# Allegro board DSP.brd
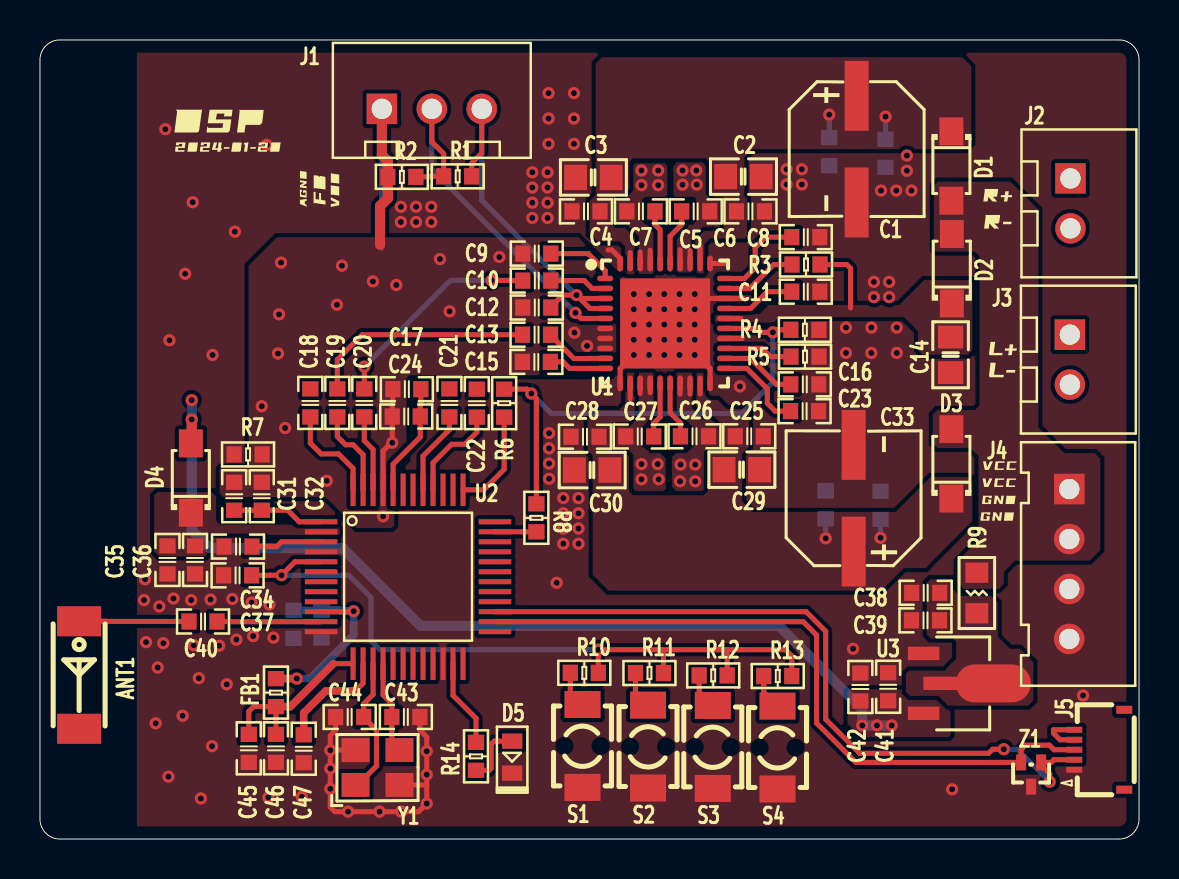
[diagram p0: board, top side]
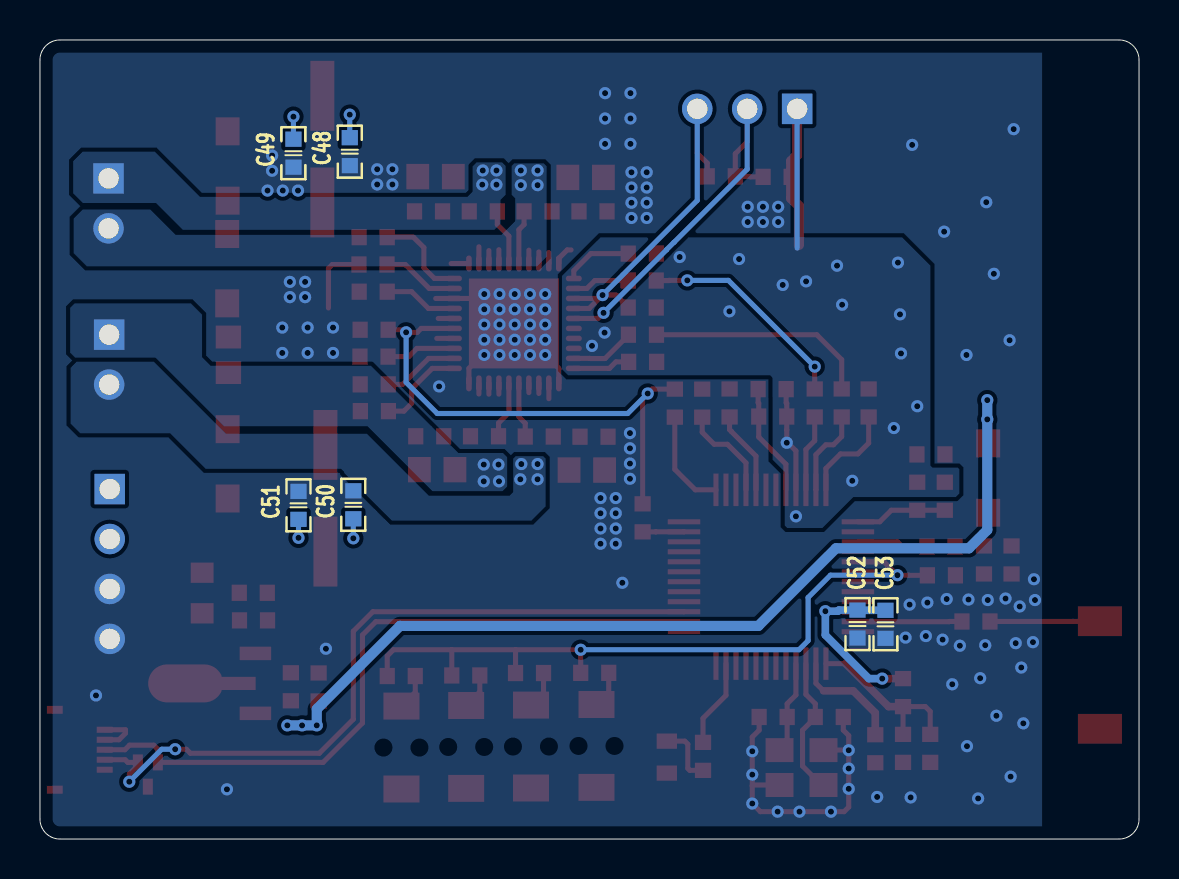
[diagram p1: board, bottom side, seen from below]

Outline 55 x 40 mm; copper layers: TOP, BOTTOM. Coordinates in mm from the lower left corner of the outline.
Outline path: 0,39 0,1 arc(0.29,0.29) 1,0 54,0 arc(54.71,0.29) 55,1 55,39 arc(54.71,39.71) 54,40 1,40 arc(0.29,39.71) 0,39

## Design rules (mm)
constraint set DEFAULT: min track width 0.203

## Placement (name value [footprint] x y rotation side)
ANT1  AN2051-245  [ANT-SMD-2X5_1]  1.96 8.21 270 top
C1  100uF  [CAP_SMD-6_3X7_7]  40.87 34.53 270 top
C2  10uF  [C0805]  35.2 33.16 180 top
C3  10uF  [C0805]  27.69 33.12 180 top
C4  1uF  [C0603]  27.32 31.42 180 top
C5  1uF  [C0603]  32.81 31.42 0 top
C6  1uF  [C0603]  35.55 31.42 0 top
C7  1uF  [C0603]  30.07 31.42 180 top
C8  1uF  [C0603]  38.32 30.13 180 top
C9  1uF  [C0603]  24.86 29.31 180 top
C10  1uF  [C0603]  24.86 27.96 180 top
C11  1uF  [C0603]  38.32 27.4 180 top
C12  1uF  [C0603]  24.86 26.61 180 top
C13  1uF  [C0603]  24.85 25.25 180 top
C14  10uF  [C0805]  45.57 24.24 90 top
C15  1uF  [C0603]  24.84 23.89 180 top
C16  220pF  [C0603]  38.27 22.76 180 top
C17  10uF  [C0603]  18.36 22.52 0 top
C18  10uF  [C0603]  13.53 21.83 270 top
C19  10uF  [C0603]  14.88 21.83 270 top
C20  0.1uF  [C0603]  16.23 21.83 270 top
C21  10uF  [C0603]  20.49 21.83 270 top
C22  10uF  [C0603]  21.86 21.82 270 top
C23  1uF  [C0603]  38.26 21.42 180 top
C24  0.1uF  [C0603]  18.33 21.15 0 top
C25  1uF  [C0603]  35.49 20.16 0 top
C26  1uF  [C0603]  32.75 20.16 0 top
C27  1uF  [C0603]  30.01 20.15 180 top
C28  1uF  [C0603]  27.27 20.14 180 top
C29  10uF  [C0805]  35.12 18.49 180 top
C30  10uF  [C0805]  27.63 18.47 180 top
C31  10uF  [C0603]  9.72 17.16 270 top
C32  0.1uF  [C0603]  11.1 17.16 270 top
C33  100uF  [CAP_SMD-6_3X7_7]  40.72 17.06 90 top
C34  1uF  [C0603]  9.91 14.64 0 top
C35  10uF  [C0603]  6.38 13.97 90 top
C36  0.1uF  [C0603]  7.76 13.97 90 top
C37  0.1uF  [C0603]  9.89 13.2 180 top
C38  0.1uF  [C0603]  44.32 12.33 180 top
C39  10uF  [C0603]  44.31 10.95 180 top
C40  10pF  [C0603]  8.16 10.89 0 top
C41  10uF  [C0603]  42.44 7.62 90 top
C42  0.1uF  [C0603]  41.05 7.61 90 top
C43  12pF(NC)  [C0603]  18.31 6.11 0 top
C44  12pF(NC)  [C0603]  15.5 6.11 180 top
C45  0.1uF  [C0603]  10.45 4.54 270 top
C46  10uF  [C0603]  11.81 4.54 270 top
C47  0.1uF  [C0603]  13.2 4.52 270 top
C48  10uF  [C0603]  39.5 34.41 90 bottom
C49  0.1uF  [C0603]  42.32 34.33 90 bottom
C50  0.1uF  [C0603]  39.32 16.73 90 bottom
C51  10uF  [C0603]  42.06 16.7 90 bottom
C52  0.1uF  [C0603]  14.09 10.76 270 bottom
C53  10uF  [C0603]  12.69 10.75 270 bottom
D1  DSK34  [SOD-123FL]  45.61 33.69 270 top
D2  DSK34  [SOD-123FL]  45.63 28.55 90 top
D3  DSK34  [SOD-123FL]  45.61 18.78 90 top
D4  DSK34  [SOD-123FL]  7.55 18.07 90 top
D5  Green  [LED0603]  23.63 4.1 270 top
FB1  600R  [R0603]  11.81 7.33 270 top
J1  XH2.54 3P  [XH_254-3P]  19.61 36.55 0 top
J2  XH2.54 2P  [XH_254-2P]  51.57 31.82 270 top
J3  XH2.54 2P  [XH_254-2P]  51.54 24 270 top
J4  XH2.54 4P  [XH_254-4P]  51.51 13.77 270 top
J5  FPC_5P  [FPC_05-5P]  53.01 4.47 90 top
NOREF  -  []  2 0 90 top
NOREF#2  -  []  9.42 34.65 0 top
NOREF#3  -  []  9.13 35.96 0 top
NOREF#4  -  []  57.9 36.71 0 top
NOREF#5  -  []  17.74 41.77 0 top
NOREF#6  -  []  58.48 10.39 0 top
NOREF#7  -  []  57.19 26.7 0 top
NOREF#8  -  []  14.81 42.05 0 top
NOREF#9  -  []  56.91 15.53 0 top
NOREF#10  -  []  56.83 17.56 0 top
NOREF#11  -  []  58.17 40.04 0 top
NOREF#12  -  []  57.17 24.13 0 top
NOREF#13  -  []  20.57 42.09 0 top
NOREF#14  -  []  0 43 0 top
NOREF#15  -  []  57.09 13.35 0 top
R1  1K  [R0603]  20.9 33.17 0 top
R2  1K  [R0603]  18.11 33.15 0 top
R3  10K  [R0603]  38.33 28.76 0 top
R4  1K  [R0603]  38.28 25.49 0 top
R5  120K  [R0603]  38.28 24.15 0 top
R6  10K  [R0603]  23.23 21.82 270 top
R7  0R  [R0603]  10.41 19.25 180 top
R8  2.2k(NC)  [R0603]  24.84 16.08 270 top
R9  5R  [R0805]  46.88 12.32 270 top
R10  39K  [R0603]  27.24 8.32 0 top
R11  2.2K  [R0603]  30.5 8.31 0 top
R12  18K  [R0603]  33.69 8.19 0 top
R13  8.2K  [R0603]  36.92 8.16 0 top
R14  1K  [R0603]  21.82 4.14 90 top
S1  MODE  [KEY_SMD]  27.15 4.66 90 top
S2  P/P  [KEY_SMD]  30.43 4.63 90 top
S3  NEXT/VOL+  [KEY_SMD]  33.67 4.61 90 top
S4  PREV/VOL-  [KEY_SMD]  36.91 4.58 90 top
U1  PAM8610TR  [WQFN40-EP-6X6]  31.28 25.81 270 top
U2  BP1048B1  [LQFP_48]  18.42 13.13 0 top
U3  HT7550S  [SOT-89-3]  45.57 7.79 180 top
Y1  24Mhz  [CRYSTAL_SMD3225-4P]  16.89 3.58 0 top
Z1  RCLAMP0502B  [SOT-523]  49.6 3.23 90 top

## Library data of the parts
ANT1 = ANT
C1 C33 = CE
C2-C32 C34-C53 = C
D1-D4 = DIODE SCHOTTKY
D5 = LED
FB1 = FB
J1 = CON_3
J2 J3 = CON_2
J4 = CON_4
J5 = CON_7
R1-R14 = R
S1-S4 = KEY_D_OPEN
U1 = PAM8610TR
U2 = BP1048B2
U3 = HT7550
Y1 = CRYSTAL_F_0
Z1 = TVS_Dual

## Footprints (pads in the part's own frame, mm; a bottom-side part is the same pattern mirrored in y, then rotated)
ANT-SMD-2X5_1
  rect 1.501x2.2 smd: 1(-2.69,0) 2(2.69,0)
C0603
  rect 0.762x0.813 smd: 1(-0.701,0) 2(0.701,0)
C0805
  rect 1.143x1.27 smd: 1(-0.889,0) 2(0.889,0)
CAP_SMD-6_3X7_7
  rect 3.5x1.199 smd: 1(-2.669,0) 2(2.669,0)
CRYSTAL_SMD3225-4P
  rect 1.399x1.199 smd: 1(-1.1,-0.874) 2(1.1,-0.874) 3(1.1,0.874) 4(-1.1,0.874)
FPC_05-5P
  rect 0.3x0.8 smd: 1(-1,1.25) 2(-0.5,1.25) 3(0,1.25) 4(0.5,1.25) 5(1,1.25)
  rect 0.4x0.8 smd: 6(2,-1.25) 7(-2,-1.25)
KEY_SMD
  rect 1.351x1.801 smd: 1(-2.075,0) 2(2.075,0)
LED0603
  rect 0.762x1.016 smd: 1(-0.8,0) 2(0.8,0)
LQFP_48
  rect 1.626x0.254 smd: 1(-4.351,2.751) 2(-4.351,2.25) 3(-4.351,1.75) 4(-4.351,1.25) 5(-4.351,0.749) 6(-4.351,0.249) 7(-4.351,-0.249) 8(-4.351,-0.749) 9(-4.351,-1.25) 10(-4.351,-1.75) 11(-4.351,-2.25) 12(-4.351,-2.751) 25(4.351,-2.751) 26(4.351,-2.25) 27(4.351,-1.75) 28(4.351,-1.25) 29(4.351,-0.749) 30(4.351,-0.249) 31(4.351,0.249) 32(4.351,0.749) 33(4.351,1.25) 34(4.351,1.75) 35(4.351,2.25) 36(4.351,2.751)
  rect 0.254x1.626 smd: 13(-2.751,-4.351) 14(-2.25,-4.351) 15(-1.75,-4.351) 16(-1.25,-4.351) 17(-0.749,-4.351) 18(-0.249,-4.351) 19(0.249,-4.351) 20(0.749,-4.351) 21(1.25,-4.351) 22(1.75,-4.351) 23(2.25,-4.351) 24(2.751,-4.351) 37(2.751,4.351) 38(2.25,4.351) 39(1.75,4.351) 40(1.25,4.351) 41(0.749,4.351) 42(0.249,4.351) 43(-0.249,4.351) 44(-0.749,4.351) 45(-1.25,4.351) 46(-1.75,4.351) 47(-2.25,4.351) 48(-2.751,4.351)
R0603
  rect 0.762x0.813 smd: 1(-0.701,0) 2(0.701,0)
R0805
  rect 1.016x1.143 smd: 1(-1.016,0) 2(1.016,0)
SOD-123FL
  rect 1.399x1.199 smd: 1(1.735,0) 2(-1.735,0)
SOT-89-3
  rect 1.575x0.673 smd: 1(1.356,-1.501) 3(1.356,1.499)
  custom 5.375x1.9 smd: 2(-1.321,0)
SOT-523
  rect 0.8x0.5 smd: 1(0.607,-0.5) 2(0.607,0.5) 3(-0.607,0)
WQFN40-EP-6X6
  oval 0.279x0.8 smd: 1(-2.25,-3) 2(-1.75,-3) 3(-1.25,-3) 4(-0.75,-3) 5(-0.25,-3) 6(0.25,-3) 7(0.75,-3) 8(1.25,-3) 9(1.75,-3) 10(2.25,-3) 21(2.25,3) 22(1.75,3) 23(1.25,3) 24(0.75,3) 25(0.25,3) 26(-0.25,3) 27(-0.75,3) 28(-1.25,3) 29(-1.75,3) 30(-2.25,3)
  oval 0.8x0.279 smd: 11(3,-2.25) 12(3,-1.75) 13(3,-1.25) 14(3,-0.75) 15(3,-0.25) 16(3,0.25) 17(3,0.75) 18(3,1.25) 19(3,1.75) 20(3,2.25) 31(-3,2.25) 32(-3,1.75) 33(-3,1.25) 34(-3,0.75) 35(-3,0.25) 36(-3,-0.25) 37(-3,-0.75) 38(-3,-1.25) 39(-3,-1.75) 40(-3,-2.25)
  rect 4.501x4.501 smd: 41(0,0)
XH_254-2P
  rect 1.524x1.524 hole 1.016: 1(-1.25,0)
  round 1.524 hole 1.016: 2(1.25,0)
XH_254-3P
  rect 1.524x1.524 hole 1.016: 1(-2.499,0)
  round 1.524 hole 1.016: 2(0,0) 3(2.499,0)
XH_254-4P
  rect 1.524x1.524 hole 1.016: 1(-3.75,0)
  round 1.524 hole 1.016: 2(-1.25,0) 3(1.25,0) 4(3.75,0)

## Nets
5V: C41.1 C42.1 D4.1 U3.3(VOUT)
AGND: C9.2 C12.2 C15.2 C17.1 C24.1 C31.1 C32.1 J1.1 R2.1 R7.1 U1.6 U1.7 U1.8 U2.45
GND: C1.2 C2.1 C3.2 C4.2 C6.2 C8.1 C11.1 C14.1 C16.1 C23.1 C25.2 C28.2 C29.1 C30.2 C33.2 C34.1 C35.1 C36.1 C37.2 C38.2 C39.2 C41.2 C42.2 C43.2 C44.2 C45.2 C46.2 C47.2 C48.1 C49.1 C50.2 C51.2 C52.2 C53.2 D5.2(CATHODE) J4.3 J4.4 J5.1 R4.2 R5.2 R7.2 S1.1 S2.1 S3.1 S4.1 U1.11 U1.20 U1.24 U1.28 U1.31 U1.40 U1.41 U2.4 U2.12 U2.22 U3.1 Y1.2 Y1.4 Z1.3
PVCCL: C25.1 C28.1 C29.2 C30.1 C33.1 C50.1 C51.1 D3.2 U1.12 U1.19
PVCCR: C1.1 C2.2 C3.1 C4.1 C6.1 C48.2 C49.2 D1.2 U1.32 U1.39
VBUS: J5.4 J5.5
VCC: D1.1 D2.1 D3.1 J4.1 J4.2 R9.1
VDD33: C52.1 C53.1 FB1.1 U2.10
AUX_L: C21.1
AUX_R: C22.1
BT_RF: C40.2 U2.11
DAC_L: C13.2 C19.1
DAC_R: C10.2 C20.1
DAC_X: C18.1
KEY: C37.1 R10.2 R11.2 R12.2 R13.2 U2.5
LOUT+: C26.2 J3.1 U1.17 U1.18
LOUT-: C27.2 J3.2 U1.13 U1.14
MUTE: R4.1 R6.1 R8.1 U1.25
POWER: C14.2 D2.2 R3.2 U1.26
ROUT+: C5.2 J2.1 U1.33 U1.34
ROUT-: C7.2 J2.2 U1.37 U1.38
USB_D+: J5.2 U2.27 Z1.1
USB_D-: J5.3 U2.26 Z1.2
N770386: R11.1 S2.2
N770424: R13.1 S4.2
N770462: R12.1 S3.2
N770500: R10.1 S1.2
N773268: C9.1 U1.1
N774002: C10.1 U1.2
N774087: C12.1 J1.3 R1.2 U1.3 U1.4(VREF)
N775087: J1.2 R1.1 R2.2 U1.5
N778232: C15.1 U1.10
N778264: C13.1 U1.9
N780483: C7.1 U1.36
N780544: C5.1 U1.35
N782637: C27.1 U1.15
N782641: C26.1 U1.16
N787715: R3.1 U1.29
N789518: C8.2 U1.30
N790218: C11.2 U1.27
N795863: R5.1 U1.23
N795893: C16.2 U1.22
N796121: C23.2 U1.21
N802020: ANT1.1 C40.1
N817418: C47.1 U2.14
N817422: C45.1 C46.1 FB1.2 U2.13
N818543: C44.1 U2.15 Y1.1
N818547: C43.1 U2.16 Y1.3
N820780: C34.2 U2.3
N821192: C35.2 C36.2 D4.2 U2.2
N824036: D5.1 R14.1
N824040: R14.2 U2.23
N824551: C21.2 U2.41
N824563: C22.2 U2.40
N824834: R8.2 U2.35
N825044: R6.2 U2.37
N825454: C18.2 U2.48
N825458: C19.2 U2.47
N825462: C20.2 U2.46
N825584: C17.2 C24.2 U2.44(VMID)
N834858: C38.1 C39.1 R9.2 U3.2
N884252: C31.2 C32.2 U2.1

Pads without a net: ANT1 2; J5 6 7; U2 6 7 8 9 17 18 19 20 21 24 25 28 29 30 31 32 33 34 36 38 39 42 43

## Via types
v1: diameter 0.61, hole 0.305, TOP to BOTTOM, 177 vias

## Routing (per net, layer and track width the routed paths; a pad name or vN(x,y) marks a point on that pad's centre or on a via; arc(x,y) is an arc through that point)
5V: length 47.3
  TOP w0.508: D4.1 7.59,19.85 v1(7.59,21.01)
  BOTTOM w0.508: v1(42.62,5.69) v1(41.88,5.69) v1(41.15,5.69) 41.15,6.5 36.98,10.67 19.05,10.67 15.16,14.55 8.51,14.55 7.59,15.47 v1(7.59,21.01) v1(7.59,21.97)
AGND: length 19.3
  TOP w0.254: C17.1 17.66,22.52 17.66,21.84 17.63,21.81 17.63,21.15 C24.1 17.63,20.49 17.63,20.49 v1(17.63,19.84) 17.58,19.84 17.17,19.43 U2.45
  TOP w0.508: J1.1 17.11,34.23 17.41,33.93 R2.1 17.41,32.08 17.02,31.68 17.02,29.74
  BOTTOM w0.254: J1.1 17.11,29.58
  vias: v1(11.1,21.67) v1(11.91,24.31) v1(11.96,26.26) v1(12.06,28.85) v1(12.27,20.57) v1(14.35,17.93) v1(14.86,26.75) v1(15.11,28.7) v1(16.66,27.91) v1(17.17,16.15) v1(17.83,27.74) v1(20.02,29.03) v1(20.5,26.42) v1(22.99,29.13) v1(26.75,25.35) v1(27.38,24.69)
GND: length 29.2
  TOP w0.254: Y1.4 14.54,4.45 v1(14.53,4.45) ; 19.35,2.67 v1(19.35,1.78) 18.95,1.37 v1(18.08,1.37) v1(16.99,1.37) v1(15.42,1.37) 14.76,1.37 14.53,1.6 v1(14.53,2.51) v1(14.53,3.53) v1(14.53,4.45) ; 19.35,2.67 19.32,2.71 Y1.2 ; 19.35,2.67 v1(19.35,3.23) v1(19.35,4.39) 19.35,5.11 19.01,5.45 19.01,6.11 C43.2 ; U1.31 34.42,28.81 ; 28.42,29.49 28.61,29.49 29.03,29.07 U1.40 ; U1.20 33.53,23.56 U1.41 29.03,23.56 U1.11 ; 33.48,27.06 U1.28 35.2,27.06 ; U1.24 35.14,25.06 ; v1(14.53,4.45) 14.53,5.18 14.8,5.45 C44.2
  vias: v1(5.21,11.96) v1(5.26,13) v1(5.31,9.86) v1(5.79,5.79) v1(5.89,8.59) v1(5.97,11.64) v1(6.17,9.8) v1(6.27,35.53) v1(6.43,3.12) v1(6.48,24.97) v1(6.68,12.04) v1(7.14,6.17) v1(7.26,28.3) v1(7.65,31.88) v1(7.57,11.96) v1(7.7,9.7) v1(7.95,8.05) v1(8.05,2.03) v1(8.53,11.99) v1(8.64,24.23) v1(8.61,4.65) v1(8.97,9.68) v1(9.35,7.75) v1(9.63,12.01) v1(9.75,30.4) v1(9.83,9.98) v1(10.59,11.84) v1(10.67,10.16) v1(11.35,34.75) v1(11.43,2.08) v1(11.48,11.73) v1(11.68,10.08) v1(13.11,2.11) v1(18.06,31.65) v1(18.06,30.89) v1(18.82,31.65) v1(18.82,30.89) v1(19.58,31.65) v1(19.58,30.89) v1(24.64,33.38) v1(24.64,32.61) v1(24.64,31.85) v1(24.64,31.09) v1(25.4,33.38) v1(25.4,32.61) v1(25.4,31.85) v1(25.4,31.09) v1(25.45,37.34) v1(25.45,36.07) v1(25.45,34.8) v1(25.48,20.32) v1(25.48,19.56) v1(25.48,18.8) v1(25.48,18.03) v1(25.86,12.83) v1(26.19,17.07) v1(26.19,16.31) v1(26.19,15.54) v1(26.19,14.78) v1(26.72,37.34) v1(26.72,36.07) v1(26.72,34.8) v1(26.95,17.07) v1(26.95,16.31) v1(26.95,15.54) v1(26.95,14.78) v1(29.72,27.28) v1(29.72,26.52) v1(29.72,25.76) v1(29.72,24.99) v1(29.72,24.23) v1(30.48,27.28) v1(30.48,26.52) v1(30.48,25.76) v1(30.48,24.99) v1(30.48,24.23) v1(31.24,27.28) v1(31.24,26.52) v1(31.24,25.76) v1(31.24,24.99) v1(31.24,24.23) v1(32,27.28) v1(32,26.52) v1(32,25.76) v1(32,24.99) v1(32,24.23) v1(32.77,27.28) v1(32.77,26.52) v1(32.77,25.76) v1(32.77,24.99) v1(32.77,24.23) v1(35.03,22.66) v1(37.36,33.53) v1(37.36,32.77) v1(38.13,33.53) v1(38.13,32.77) v1(40.34,25.6) v1(40.34,24.33) v1(40.69,9.53) v1(41.61,25.6) v1(41.61,24.33) v1(41.73,27.89) v1(41.73,27.13) v1(42.09,32.46) v1(42.49,27.89) v1(42.49,27.13) v1(42.85,32.46) v1(42.88,25.6) v1(42.88,24.33) v1(43.38,34.21) v1(43.38,33.45) v1(43.61,32.46) v1(45.64,2.49) v1(52.2,7.19)
PVCCL: length 3.2
  TOP w0.254: 29.53,22.04 U1.12 ; U1.19 33.03,22.28
  BOTTOM w0.254: C51.1 v1(42.06,15.08) ; C50.1 v1(39.32,15.05)
PVCCR: length 3.7
  TOP w0.254: 29.53,29.36 U1.39 ; U1.32 33.03,29.65
  BOTTOM w0.254: C48.2 v1(39.5,36.26) ; C49.2 v1(42.32,36.16)
VBUS: length 2.4
  TOP w0.254: J5.5 50.72,5.47 50.72,5.29 51.05,4.97 J5.4
VDD33: length 10.7
  TOP w0.254: U2.10 15.67,11.38
  TOP w0.381: 15.67,11.38 v1(15.7,11.4) ; FB1.1 v1(12.85,8.03)
  BOTTOM w0.381: 12.69,11.45 C53.1 12.69,11.45 ; 12.69,11.45 14.08,11.45 C52.1 15.02,11.46 15.07,11.4 v1(15.7,11.4) 15.7,10.21 13.52,8.03 v1(12.85,8.03) ; 12.69,11.45 12.66,11.45
BT_RF: length 5.2
  TOP w0.254: U2.11 9.51,10.88 9.5,10.89 C40.2
DAC_L: length 11.3
  TOP w0.254: C13.2 16.13,25.25 14.88,24 C19.1
DAC_R: length 10.8
  TOP w0.254: C20.1 v1(16.23,23.65) ; v1(22.61,27.97) 23.52,27.97 23.53,27.96 C10.2
  BOTTOM w0.254: v1(22.61,27.97) 20.55,27.97 v1(16.23,23.65)
KEY: length 36.8
  TOP w0.254: 34.39,9.48 37.31,9.48 37.62,9.17 37.62,8.16 R13.2 ; 34.39,9.48 34.39,9.47 R12.2 ; 34.39,9.48 31.19,9.48 ; R11.2 31.2,8.31 31.2,9.47 31.19,9.48 ; 31.19,9.48 v1(27.94,9.48) R10.2 ; C37.1 11.52,13.2 11.53,13.21 v1(12.09,13.21) 12.76,13.88 U2.5
  BOTTOM w0.254: v1(27.94,9.48) 17.02,9.48 16.56,9.93 16.56,12.09 15.44,13.21 v1(12.09,13.21)
LOUT+: length 1.1
  TOP w0.254: U1.18 32.53,22.27 ; 32.03,22.27 U1.17
  vias: v1(32.03,17.91) v1(32.05,18.75) v1(32.79,18.75) v1(32.79,17.91)
LOUT-: length 1
  TOP w0.254: U1.14 30.53,22.35 ; 30.03,22.3 U1.13
  vias: v1(30.1,18.77) v1(30.1,18.01) v1(30.91,18.77) v1(30.96,18.01)
MUTE: length 26.2
  TOP w0.254: R4.1 36.8,25.49 v1(36.68,25.37) 36.12,25.37 35.92,25.56 U1.25 ; R8.1 24.84,22.05 v1(24.59,22.3) 24.37,22.52 23.23,22.52 R6.1
  BOTTOM w0.254: v1(24.59,22.3) 25.59,21.3 35.12,21.3 36.68,22.86 v1(36.68,25.37)
POWER: length 4.4
  TOP w0.254: 40.56,26.58 40.56,28.57 40.37,28.76 R3.2 ; U1.26 35.07,26.06
ROUT+: length 1.3
  TOP w0.254: 32.03,29.5 U1.34 ; U1.33 32.53,29.46
  vias: v1(32.16,33.47) v1(32.16,32.76) v1(32.84,33.47) v1(32.87,32.76)
ROUT-: length 1.2
  TOP w0.254: U1.37 30.53,29.48 ; 30.03,29.39 U1.38
  vias: v1(30.1,33.47) v1(30.1,32.73) v1(30.94,33.47) v1(30.94,32.73)
USB_D+: length 36.9
  TOP w0.254: J5.2 50.74,3.97 50.6,3.84 Z1.1 50.1,3.69 50.53,3.26 v1(50.53,2.87) ; U2.27 38.34,11.38 39.32,10.4 39.32,5.99 41.02,4.29 47.47,4.29 47.68,4.5 v1(48.23,4.5)
  BOTTOM w0.254: v1(48.23,4.5) 48.9,4.5 v1(50.53,2.87)
USB_D-: length 35.3
  TOP w0.254: U2.26 38.19,10.88 38.86,10.21 38.86,5.8 40.83,3.84 Z1.2 49.1,4.49 49.31,4.7 50.52,4.7 50.75,4.47 J5.3
N770386: length 1.9
  TOP w0.254: S2.2 29.8,7.34 R11.1
N770424: length 1.8
  TOP w0.254: R13.1 36.22,7.35 S4.2
N770462: length 1.8
  TOP w0.254: S3.2 32.99,7.37 R12.1
N770500: length 1.8
  TOP w0.254: S1.2 26.54,7.35 R10.1
N773268: length 3.5
  TOP w0.254: C9.1 27.43,29.31 28.28,28.45 U1.1
N774002: length 2.9
  TOP w0.254: C10.1 27.23,27.96 27.63,27.56 U1.2
N774087: length 19.4
  TOP w0.254: U1.4 27.52,26.56 27.02,27.06 ; C12.1 25.56,26.63 26.16,27.23 v1(26.85,27.23) 27.02,27.06 ; 27.02,27.06 U1.3 ; J1.3 22.11,34.34 21.61,33.83 R1.2
  BOTTOM w0.254: J1.3 22.11,31.97 v1(26.85,27.23)
N775087: length 19.8
  TOP w0.254: U1.5 27.08,26.06 v1(26.8,26.34) ; R2.2 19.45,33.15 19.47,33.17 R1.1 20.2,34.31 19.61,34.9 J1.2
  BOTTOM w0.254: v1(26.8,26.34) 23.65,29.49 23.65,29.5 23.28,29.87 23.27,29.87 19.61,33.53 J1.2
N778232: length 2.9
  TOP w0.254: C15.1 26.18,23.89 26.5,23.56 U1.10
N778264: length 3.2
  TOP w0.254: C13.1 25.55,25.22 26.72,24.05 27.48,24.05 27.48,24.06 U1.9
N780483: length 2.7
  TOP w0.254: U1.36 31.03,30.5 30.78,30.76 C7.1
N780544: length 2.8
  TOP w0.254: C5.1 32.11,30.76 31.53,30.18 U1.35
N782637: length 2.8
  TOP w0.254: C27.1 30.72,20.81 31.03,21.13 U1.15
N782641: length 2.9
  TOP w0.254: C26.1 32.05,20.82 31.53,21.34 U1.16
N787715: length 3.8
  TOP w0.254: U1.29 35.52,27.56 36.72,28.76 R3.1
N789518: length 4.8
  TOP w0.254: C8.2 36.31,30.13 35.79,29.61 35.79,28.59 35.26,28.06 U1.30
N790218: length 3.7
  TOP w0.254: C11.2 36.4,27.4 35.56,26.56 U1.27
N795863: length 3.5
  TOP w0.254: R5.1 36.55,24.15 36.14,24.56 U1.23
N795893: length 3.8
  TOP w0.254: U1.22 35.55,24.06 36.85,22.76 C16.2
N796121: length 4.6
  TOP w0.254: U1.21 35.37,23.56 36.4,22.53 36.4,21.81 36.79,21.42 C23.2
N802020: length 5.5
  TOP w0.254: C40.1 3.32,10.89 3.31,10.9 ANT1.1
N817418: length 5.7
  TOP w0.254: U2.14 16.17,7.8 15.79,7.42
  TOP w0.381: 15.79,7.42 14.3,7.42 13.2,6.32 C47.1
N817422: length 8.7
  TOP w0.254: C46.1 FB1.2 11.81,6.63 10.69,6.63 10.45,6.39 C45.1 ; U2.13 14.68,8.78
  TOP w0.381: 14.68,8.78 12.53,6.63 11.81,6.63 FB1.2
N818543: length 7
  TOP w0.254: Y1.1 15.89,2.71 16.84,3.66 16.84,5.45 16.2,6.08 16.2,6.11 C44.1 16.2,6.77 16.67,7.24 U2.15
N818547: length 4.7
  TOP w0.254: U2.16 17.17,7.21 17.61,6.77 C43.1 17.61,4.83 Y1.3
N820780: length 3.6
  TOP w0.254: U2.3 12.09,14.88 11.85,14.64 C34.2
N824036: length 3.1
  TOP w0.254: D5.1 22.73,4.9 22.58,4.75 22.58,3.54 22.48,3.44 R14.1
N824040: length 4.4
  TOP w0.254: U2.23 20.67,7.19 21.82,6.04 R14.2
N824551: length 4.2
  TOP w0.254: U2.41 19.17,19.17 20.4,20.4 20.4,20.4 20.49,20.49 C21.2
N824563: length 4.9
  TOP w0.254: C22.2 21.86,20.36 21.26,19.76 20.6,19.76 19.67,18.83 U2.40
N824834: length 2.1
  TOP w0.254: R8.2 24.18,15.38 24.18,15.38 U2.35
N825044: length 5.1
  TOP w0.254: R6.2 23.23,18.51 22.21,17.48 U2.37
N825454: length 5
  TOP w0.254: C18.2 13.53,19.82 14.07,19.28 14.94,19.28 15.67,18.55 U2.48
N825458: length 4.4
  TOP w0.254: U2.47 16.17,19.24 15.67,19.74 15.29,19.74 14.88,20.15 C19.2
N825462: length 3.8
  TOP w0.254: U2.46 16.67,19.5 16.23,19.94 C20.2
N825584: length 5.6
  TOP w0.254: C17.2 19.06,21.84 19.03,21.81 C24.2 19.03,20.12 17.67,18.76 U2.44
N884252: length 4.6
  TOP w0.254: 11.1,16.46 9.72,16.46 C31.2 ; 11.1,16.46 C32.2 11.1,16.46 ; 11.1,16.46 12.4,16.46 12.97,15.88 U2.1

## Copper pours and planes (outline as drawn; the poured copper is in the pictures)
5V on TOP: 40.41,7.39 40.41,5.77 41.07,5.11 45.47,5.11 45.57,5.21 45.57,6.38 44.98,6.96 43.51,6.96 43.28,7.19 43.28,7.37 43.15,7.49 40.51,7.49
AGND on TOP: 26.31,24.48 26.7,24.48 26.85,24.32 28.75,24.32 28.88,24.45 28.88,25.7 28.78,25.8 26.62,25.8 26.24,25.42 26.24,24.55
AGND on TOP: 17.73,15.7 17.73,18.38 18.34,18.99 18.34,23.09 18.47,23.22 28.57,23.22 28.88,23.52 28.88,28.18 26.94,30.12 11.86,30.12 10.44,28.7 10.44,18.69 10.34,18.59 9.07,18.59 8.99,18.52 8.99,17.3 9.17,17.12 14.3,17.12 15.85,15.57 17.6,15.57
AGND on BOTTOM: 17.73,15.7 17.73,18.38 18.34,18.99 18.34,22.14 18.34,22.14 18.34,23.09 18.47,23.22 28.57,23.22 28.88,23.52 28.88,28.18 26.94,30.12 11.86,30.12 10.44,28.7 10.44,18.69 10.34,18.59 9.07,18.59 8.99,18.52 8.99,17.3 9.17,17.12 14.3,17.12 15.85,15.57 17.6,15.57
PVCCL on TOP: 44.58,18.13 46.41,18.13 46.66,17.87 46.66,15.93 44.53,13.79 44.53,13.77 44.32,13.56 43.23,13.56 42.1,12.44 28.45,12.44 27.66,13.22 27.66,19.19 27.41,19.45 27.41,20.97 27.91,21.48 28.98,21.48 29.29,21.78 29.29,23.23 29.41,23.36 29.72,23.36 29.77,23.31 29.77,21.2 29.44,20.87 28.83,20.87 28.6,20.64 28.6,19.47 28.77,19.31 29.32,19.31 29.48,19.15 29.48,17.4 29.67,17.21 33.22,17.21 33.43,17.42 33.43,19.19 33.58,19.35 34.06,19.35 34.24,19.52 34.24,20.64 33.68,21.2 33.3,21.2 32.84,21.66 32.84,23.28 32.92,23.36 33.17,23.36 33.27,23.26 33.27,22.22 33.5,21.99 33.91,21.99 34.37,21.53 35.36,21.53 35.48,21.4 35.48,19.62 35.13,19.27 35.13,16.91 35.66,16.37 42.82,16.37
PVCCR on TOP: 35.66,34.53 46.3,34.53 46.61,34.84 46.61,38.67 46.15,39.13 28.12,39.13 27.81,38.83 27.81,32.25 27.51,31.94 27.51,30.29 27.89,29.91 29.03,29.91 29.29,29.66 29.29,28.39 29.41,28.26 29.69,28.26 29.77,28.34 29.77,30.09 29.26,30.6 28.75,30.6 28.65,30.7 28.65,31.97 28.96,32.27 29.21,32.27 29.49,32.55 29.49,33.9 29.67,34.08 33.32,34.08 33.53,33.87 33.53,32.35 33.73,32.15 34.14,32.15 34.21,32.07 34.21,30.45 33.25,30.45 32.79,29.99 32.79,28.44 32.92,28.31 33.17,28.31 33.25,28.39 33.25,29.78 33.53,30.06 35.26,30.06 35.38,30.19 35.38,32.07 35.26,32.2 35.26,34.13
VCC on TOP: 52.53,13.94 48.79,13.94 48.23,13.38 48.23,12.78 47.98,12.52 46.23,12.52 45.92,12.83 45.92,13.92 46.96,14.96 46.96,19.17 46.56,19.57 44.91,19.57 44.68,19.8 44.68,21.25 44.91,21.48 46.79,21.48 47.02,21.71 47.02,29.18 46.79,29.4 44.83,29.4 44.73,29.51 44.73,32.71 44.93,32.91 48.56,32.91 49.96,31.51 49.96,20.62 51.26,19.32 52.78,19.32 53.06,19.04 53.06,14.47
LOUT+ on TOP: 31.9,23.36 32.61,23.36 32.69,23.28 32.69,21.58 33.2,21.07 33.53,21.07 34.06,20.54 34.06,19.68 33.93,19.55 33.4,19.55 33.22,19.37 33.22,17.47 33.17,17.42 31.85,17.42 31.62,17.64 31.62,19.12 31.83,19.32 32.36,19.32 32.74,19.7 32.74,20.56 31.83,21.48 31.83,23.28
LOUT+ on BOTTOM: 49.25,24.1 53.24,24.1 53.49,24.35 53.49,26.58 53.26,26.81 47.45,26.81 46.89,26.25 46.89,24.12 46.46,23.69 38.43,23.69 34.06,19.32 31.83,19.32 31.62,19.12 31.62,17.64 31.85,17.42 35.36,17.42 38.61,20.67 45.82,20.67
LOUT- on TOP: 30.02,23.36 30.63,23.36 30.76,23.23 30.76,21.25 30.07,20.56 30.07,19.78 30.53,19.32 31.04,19.32 31.32,19.04 31.32,17.54 31.19,17.42 29.79,17.42 29.69,17.52 29.69,19.22 29.44,19.47 28.85,19.47 28.75,19.57 28.75,20.69 28.85,20.79 29.59,20.79 29.92,21.12 29.92,23.26
LOUT- on BOTTOM: 29.69,19.04 29.69,16.65 30.4,15.94 37.39,15.94 39.78,18.33 39.78,18.38 39.93,18.53 46.71,18.53 48.49,20.31 52.98,20.31 53.47,20.79 53.47,23.59 53.16,23.89 49.3,23.89 45.69,20.29 38.63,20.29 35.53,17.19 31.5,17.19 31.32,17.36 31.32,19.04 31.19,19.17 29.82,19.17
POWER on TOP: 33.86,25.85 36.7,25.85 36.98,26.13 43.23,26.13 43.94,25.42 43.94,24.48 44.17,24.25 46.43,24.25 46.66,24.48 46.66,27.85 46.53,27.98 44.25,27.98 43,26.74 36.47,26.74 36.02,26.28 33.88,26.28 33.78,26.18 33.78,25.92
ROUT+ on TOP: 31.93,28.36 32.64,28.36 32.74,28.46 32.74,30.17 33.2,30.62 34.01,30.62 34.14,30.75 34.14,32.02 34.06,32.1 33.66,32.1 33.35,32.4 33.35,33.67 33.15,33.87 31.88,33.87 31.7,33.7 31.7,32.25 31.8,32.15 32.74,32.15 32.84,32.05 32.84,30.93 32.66,30.75 32.49,30.75 31.83,30.09 31.83,28.46
ROUT+ on BOTTOM: 49.25,34.41 52.86,34.41 53.34,33.93 53.34,32.32 52.86,31.84 49.2,31.84 47.85,30.5 32.26,30.5 31.95,30.8 31.95,31.99 31.7,32.25 31.7,33.7 31.88,33.87 33.15,33.87 33.35,33.67 33.35,32.4 33.6,32.15 46.99,32.15
ROUT- on TOP: 29.92,28.29 30.63,28.29 30.76,28.41 30.76,30.37 30.35,30.78 30.25,30.78 30.12,30.9 30.12,31.99 30.28,32.15 31.29,32.15 31.39,32.25 31.39,33.7 31.27,33.82 29.79,33.82 29.67,33.7 29.67,32.43 29.39,32.15 28.96,32.15 28.75,31.94 28.75,30.8 28.85,30.7 29.36,30.7 29.84,30.22 29.84,28.36
ROUT- on BOTTOM: 49.48,31.51 52.86,31.51 53.31,31.05 53.31,29.33 52.65,28.67 30.12,28.67 29.64,29.15 29.64,33.67 29.79,33.82 31.27,33.82 31.39,33.7 31.39,32.25 31.22,32.07 31.22,30.93 31.9,30.24 48.21,30.24
N821192 on TOP: 5.97,14.15 8.28,14.15 8.36,14.22 8.36,15.24 8.41,15.29 11.38,15.29 11.46,15.21 14.94,15.21 15.01,15.29 15.01,15.49 14.91,15.6 12.75,15.6 12.6,15.75 9.02,15.75 8.81,15.95 8.81,17.14 8.59,17.37 5.89,17.37 5.71,17.2 5.71,14.4
N834858 on TOP: 44.37,12.83 44.37,10.24 44.58,10.03 45.69,10.03 45.85,9.88 45.85,9.02 45.34,8.51 45.34,8.48 45.29,8.43 43.48,8.43 43.33,8.28 43.33,7.37 43.54,7.16 44.96,7.16 45.44,6.68 49.45,6.68 49.71,6.93 49.71,8.86 49.05,9.53 48.54,9.53 47.93,10.13 47.93,11.84 47.6,12.17 46.02,12.17 45.69,12.5 45.69,12.85 45.54,13 44.55,13
GND on TOP, BOTTOM: 54,39.36 54.26,39.26 54.36,39 54.36,1 54.26,0.74 54,0.64 4.85,0.64 4.85,39.36
